# Altium PCB PCB1.PcbDoc
Units mm, origin at the board's own origin, x right, y up, seen from the top; angles counter-clockwise.
Board outline 100 x 50 mm, 2 copper layers (Top Layer, Bottom Layer); 18 components, 18 nets, 53 pads, 0 vias.
Unrouted connection lines stored in the file: 32.
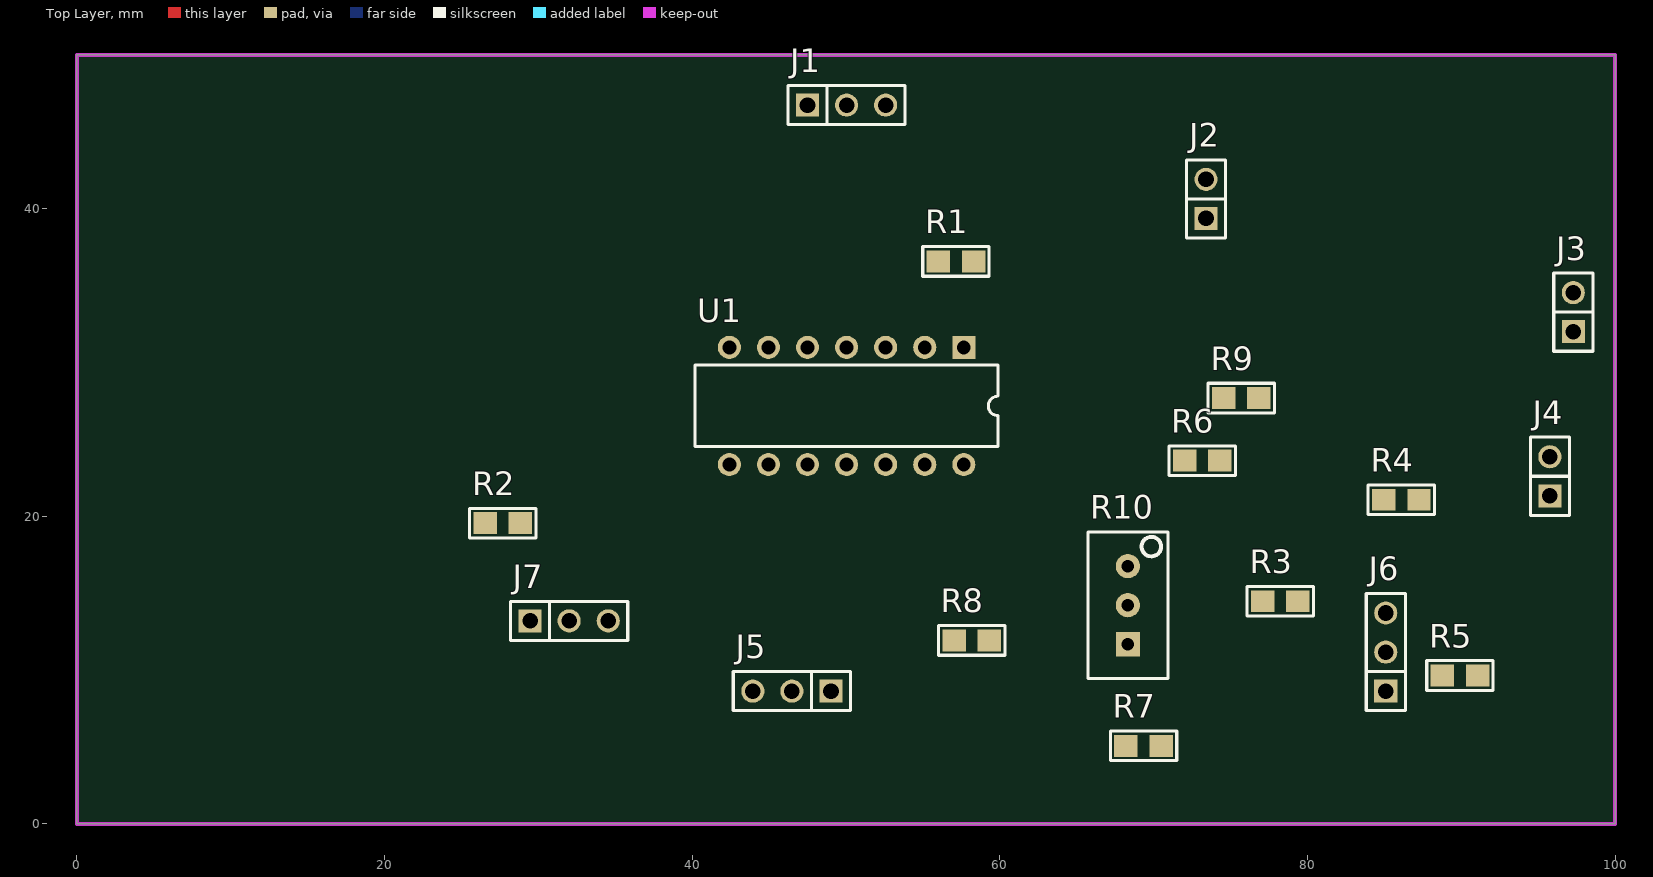
[diagram p0: Top Layer view]
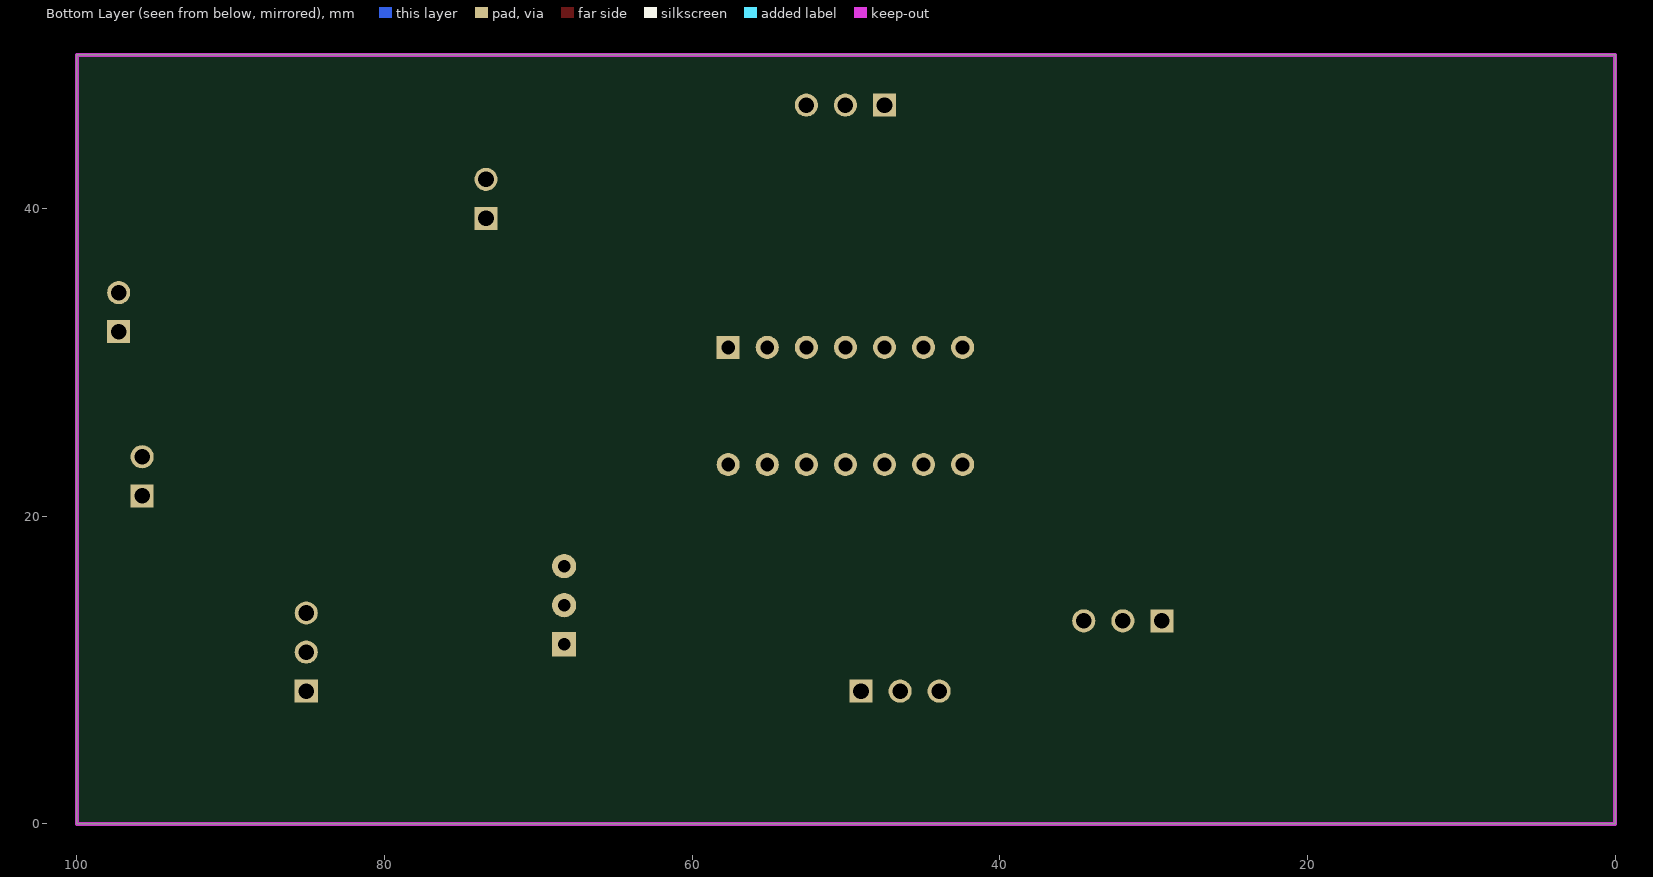
[diagram p1: Bottom Layer view, seen from below]

## Layer stack, top to bottom
Top Solder: solder mask 0.0102, Solder Resist, Dk 3.5
Top Layer: signal copper 0.0356
Dielectric 1: dielectric 0.32, FR-4, Dk 4.8
Bottom Layer: signal copper 0.0356
Bottom Solder: solder mask 0.0102, Solder Resist, Dk 3.5

## Board outline
0,0 100,0 100,50 0,50

## Design rules (kind name [scope] priority, off if disabled: settings)
Clearance [All] p1: gap=0.254
PolygonConnect [All] p1: connectstyle=Relief reliefconductorwidth=0.254 reliefentries=4 polygonreliefangle="90 Angle" airgapwidth=0.254
RoutingVias [All] p1: holewidth=0.711 width=1.27 viastyle="Through Hole" minholewidth=0.711 minwidth=1.27 maxholewidth=0.711 maxwidth=1.27
SolderMaskExpansion [All] p1: expansion=0.102
Width [All] p1: maxlimit=0.254 minlimit=0.254 preferedwidth=0.254
30 further rules are at their usual default settings.

## Components (designator, comment, footprint, x,y, rotation, side; value= is the part's Value field where it differs from the comment)
J1 "CON3" SIP3 50.038,46.736 r0 top
J2 "CON2" SIP2 73.406,40.64 r90 top
J3 "CON2" SIP2 97.282,33.274 r90 top
J4 "CON2" SIP2 95.758,22.606 r90 top
J5 "CON3" SIP3 46.482,8.636 r180 top
J6 "CON3" SIP3 85.09,11.176 r90 top
J7 "CON3" SIP3 32.004,13.208 r0 top
R1 "RES" 0805 57.15,36.576 r0 top
R2 "RES" 0805 27.686,19.558 r0 top
R3 "RES" 0805 78.232,14.478 r0 top
R4 "RES" 0805 86.106,21.082 r0 top
R5 "RES" 0805 89.916,9.652 r0 top
R6 "RES" 0805 73.152,23.622 r0 top
R7 "RES" 0805 69.342,5.08 r0 top
R8 "RES" 0805 58.166,11.938 r0 top
R9 "RES" 0805 75.692,27.686 r0 top
R10 "PRESET" "PRESET V" 68.326,14.224 r90 top
U1 "TL084ACN" 646-06 50.038,27.178 r180 top

## Footprints (in the part's own frame and the unit in brackets; to place one, negate y for a bottom-side part, rotate by r counter-clockwise, add the part's x,y. Pads: shape width x height; smd on the part's side, far side on the other; paste and mask are expansions set on the pad)
646-06 [mm] "DIP; 14 Leads; Row Spacing 7.62 mm; Pitch 2.54 mm"
  rect 1.5x1.5 hole 0.9: 1(-7.62,-3.81)
  round 1.5 hole 0.9: 2(-5.08,-3.81) 3(-2.54,-3.81) 4(0,-3.81) 5(2.54,-3.81) 6(5.08,-3.81) 7(7.62,-3.81) 8(7.62,3.81) 9(5.08,3.81) 10(2.54,3.81) 11(0,3.81) 12(-2.54,3.81) 13(-5.08,3.81) 14(-7.62,3.81)
  silkscreen extent -9.85,-2.65 9.85,2.65
0805 [mil] "Pasivo 0805"
  rect 60x56 smd: 1(-45,0) 2(45,0)
  silkscreen extent -85,-38 85,38, body extent -40,-24 39,25, height 15
"PRESET V" [mil]
  rect 62x62 hole 32: 1(-100,0)
  round 62 hole 32: 2(0,0) 3(100,0)
  silkscreen extent -188,-102 188,102, body extent -185,-95 190,95, height 455
SIP2 [mm]
  rect 1.5x1.5 hole 1.016: 1(-1.27,0)
  round 1.5 hole 1.016: 2(1.27,0)
  silkscreen extent -2.54,-1.27 2.54,1.27
SIP3 [mm]
  rect 1.5x1.5 hole 1.016: 1(-2.54,0)
  round 1.5 hole 1.016: 2(0,0) 3(2.54,0)
  silkscreen extent -3.81,-1.27 3.81,1.27, body extent -3.81,-1.3 3.81,1.24, height 8.38

## Part data
U1: "JFET-Input Operational Amplifier"

## Nets (pads, with @x,y where several pads share a name; then routed paths per layer and width w, separated by ;. In a path a pad name is that pad's centre, name@x,y a point inside that pad or via, vN(x,y) a via of type N, cw(c..) or ccw(c..) an arc to the next point about the centre after c; other vN are vias at no path point)
+VCC: J1.1 U1.4
-VCC: J1.3 U1.11
GND: J1.2 J2.2 J3.2 J4.2 J6.2 U1.9
NetJ5_1: J5.1 R5.1
NetJ5_3: J5.3 R10.1
NetJ6_3: J6.3 R9.2 U1.10
NetJ7_3: J7.3 U1.8
NetR1_1: R1.1 R3.2 U1.1
NetR1_2: R1.2 R2.1 U1.6
NetR3_1: R3.1 R4.2 U1.2
NetR4_1: R4.1 R5.2 R6.2 R10.3
NetR6_1: R6.1 R7.2 U1.13
NetR7_1: R7.1 R8.1 U1.14
NetR8_2: R8.2 R9.1 U1.5
OUT: J4.1 R2.2 U1.7
V1: J2.1 U1.3
V2: J3.1 U1.12
VFEED: J5.2 J7.2
pads on no net: J6.1 J7.1 R10.2

## Keep-outs
Keep-Out Layer:
  the board outline again, w0.254